# EAGLE board IO4-SignalDriver-Small_array (EAGLE 7.7.0)
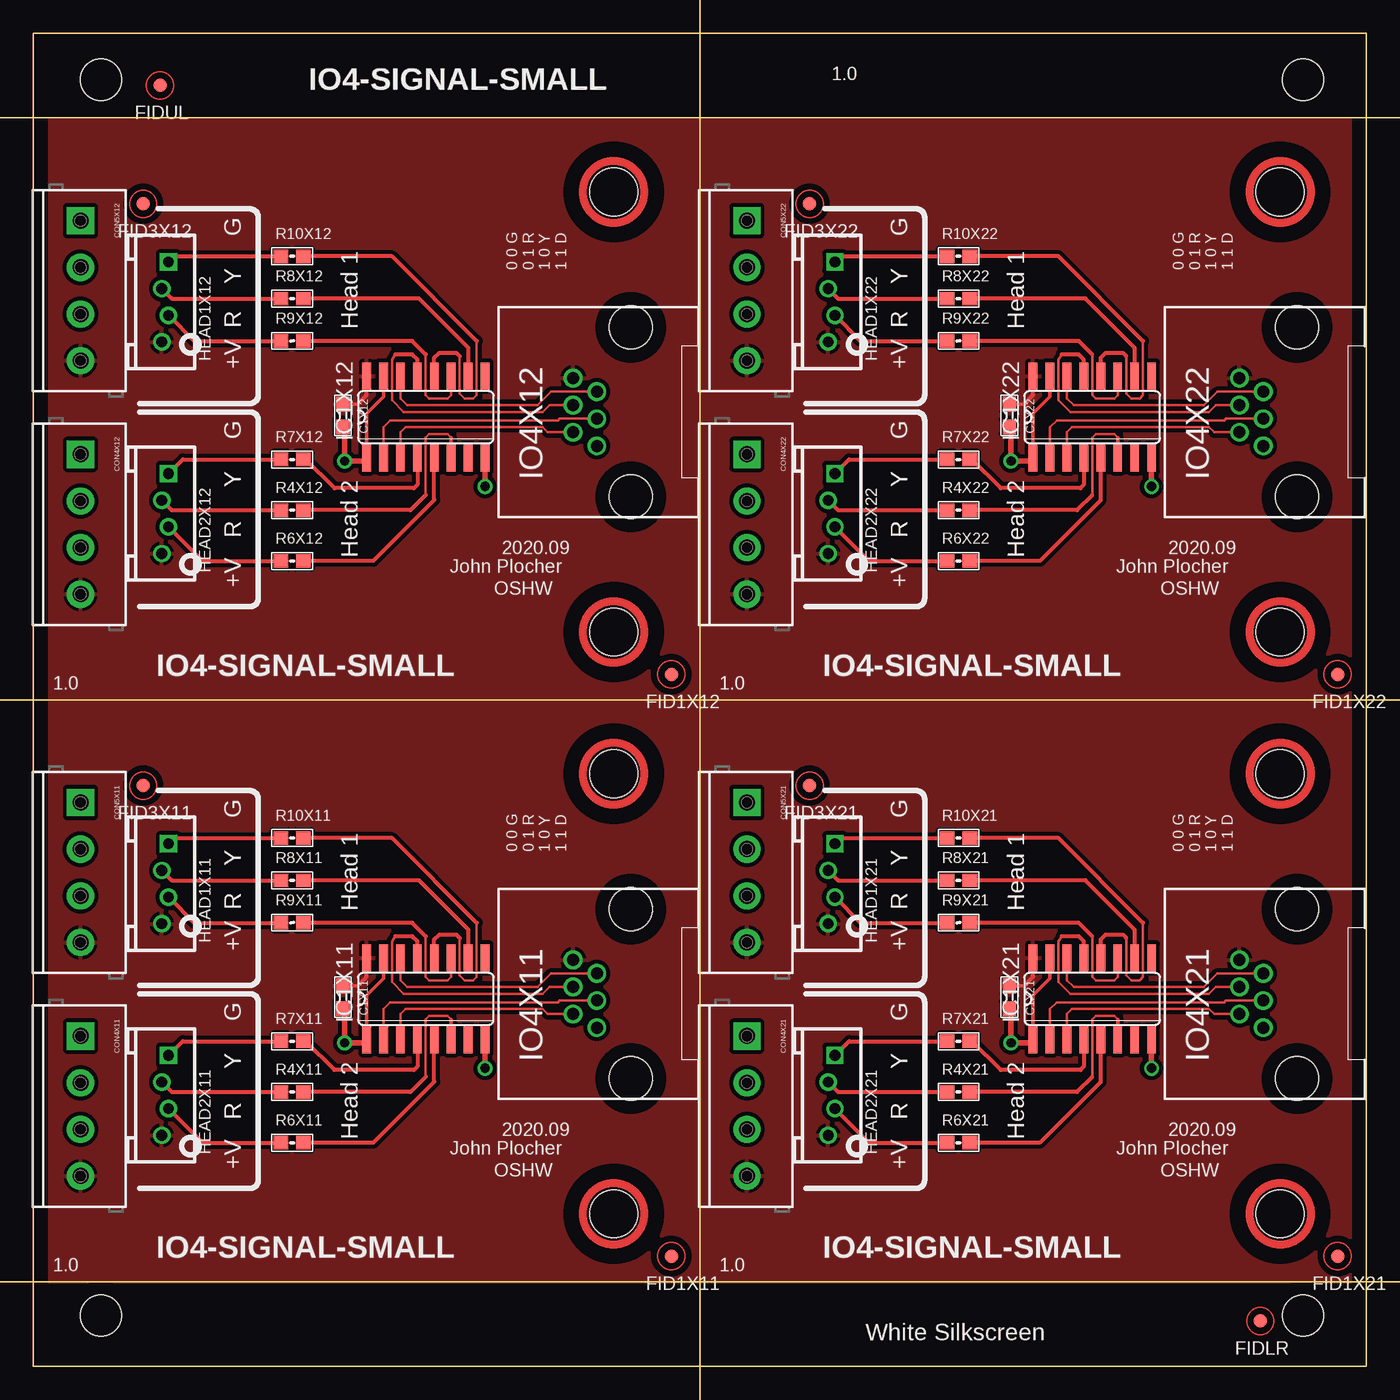
[diagram p0: board, top side]
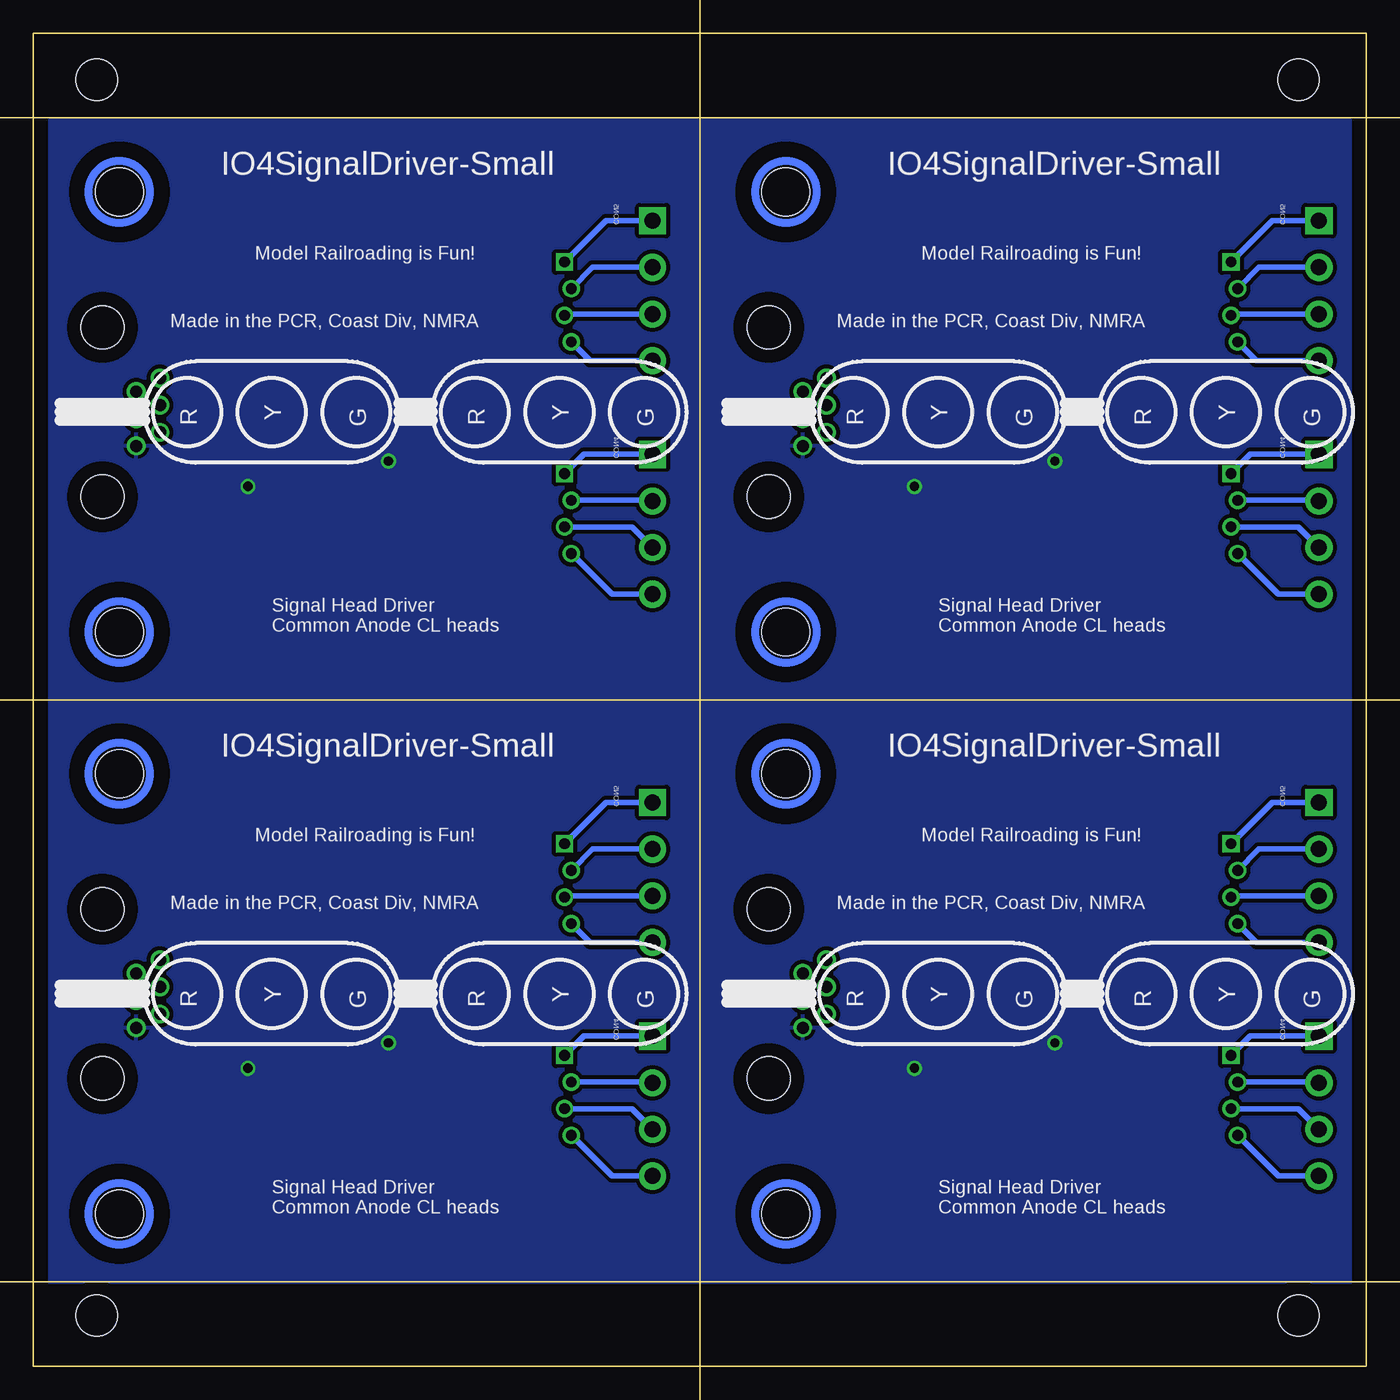
[diagram p1: board, bottom side, seen from below]

Size 100 x 100 mm. Coordinates in mm from the lower left corner, seen from the top.
Copper layers (1*16): Top 0.035mm / dielectric 1.5mm / Bottom 0.035mm
Design rules "default": minimum track width 10mil, minimum drill 0.6mm, track to track 8mil, track to pad 8mil, pad to pad 8mil, via to via 8mil, smd to smd 8mil, copper to edge 40mil, drill to drill 8mil, minimum pad ring 10mil, minimum via ring 8mil, stop-mask expansion 4mil, vias tented up to drill 0mil, thermal gap 10mil

## Footprints (pad centres in the part's own frame; a part is rotated, then mirrored left to right if it is on the bottom)
BOARD-10X10-2X2-PANEL = hole 3.1: 5.08,96.52; 95.25,96.52; 5.08,3.81; 95.25,3.81
0603-CAP = smd 1.1 x 1: 1 -0.85,0; 2 0.85,0
SCREWTERMINAL-3.5MM-4 = drill 1.2 pad 2.032 square: 1 0,0 | drill 1.2 pad 2.032: 2 3.5,0; 3 7,0; 4 10.5,0
FIDUCIAL_1MM = smd 1 x 1: 1 0,0
4P-2.0 = drill 0.8 pad 1.27 square: 1 -3,0.254 | drill 0.8 pad 1.27: 2 -1,-0.254; 3 1,0.254; 4 3,-0.254
SO16 = smd 0.66 x 2.032: 1 -4.445,-3.073; 2 -3.175,-3.073; 3 -1.905,-3.073; 4 -0.635,-3.073; 5 0.635,-3.073; 6 1.905,-3.073; 7 3.175,-3.073; 8 4.445,-3.073; 9 4.445,3.073; 10 3.175,3.073; 11 1.905,3.073; 12 0.635,3.073; 13 -0.635,3.073; 14 -1.905,3.073; 15 -3.175,3.073; 16 -4.445,3.073
RJ25-INVERTED = drill 0.9 pad 1.4: 1 2.54,4.318; 2 1.524,2.54; 3 0.508,4.318; 4 -0.508,2.54; 5 -1.524,4.318; 6 -2.54,2.54 | hole 3.251: -6.35,0; 6.35,0
0603-RES = smd 1.1 x 1: 1 -0.85,0; 2 0.85,0
MOUNTINGHOLE = hole 3.6: 0,0

## Placement (x,y rotation side)
BOARD  BOARD  [BOARD-10X10-2X2-PANEL]  0,0 0 top
C1X11  0.1UF  [0603-CAP]  23.23,27.69 270 top
C1X12  0.1UF  [0603-CAP]  23.23,71.34 270 top
C1X21  0.1UF  [0603-CAP]  73.22,27.69 270 top
C1X22  0.1UF  [0603-CAP]  73.22,71.34 270 top
CON4X11  3.5mm  [SCREWTERMINAL-3.5MM-4]  3.54,24.77 270 top
CON4X12  3.5mm  [SCREWTERMINAL-3.5MM-4]  3.54,68.42 270 top
CON4X21  3.5mm  [SCREWTERMINAL-3.5MM-4]  53.54,24.77 270 top
CON4X22  3.5mm  [SCREWTERMINAL-3.5MM-4]  53.54,68.42 270 top
CON5X11  3.5mm  [SCREWTERMINAL-3.5MM-4]  3.54,42.29 270 top
CON5X12  3.5mm  [SCREWTERMINAL-3.5MM-4]  3.54,85.94 270 top
CON5X21  3.5mm  [SCREWTERMINAL-3.5MM-4]  53.54,42.29 270 top
CON5X22  3.5mm  [SCREWTERMINAL-3.5MM-4]  53.54,85.94 270 top
FID1X11  FIDUCIAL  [FIDUCIAL_1MM]  47.86,8.26 0 top
FID1X12  FIDUCIAL  [FIDUCIAL_1MM]  47.86,51.91 0 top
FID1X21  FIDUCIAL  [FIDUCIAL_1MM]  97.86,8.26 0 top
FID1X22  FIDUCIAL  [FIDUCIAL_1MM]  97.86,51.91 0 top
FID3X11  FIDUCIAL  [FIDUCIAL_1MM]  8.24,43.56 0 top
FID3X12  FIDUCIAL  [FIDUCIAL_1MM]  8.24,87.21 0 top
FID3X21  FIDUCIAL  [FIDUCIAL_1MM]  58.24,43.56 0 top
FID3X22  FIDUCIAL  [FIDUCIAL_1MM]  58.24,87.21 0 top
FIDLR  FIDUCIAL  [FIDUCIAL_1MM]  92.06,3.39 0 top
FIDUL  FIDUCIAL  [FIDUCIAL_1MM]  9.51,96.1 0 top
HEAD1X11  2mm  [4P-2.0]  9.89,36.2 270 top
HEAD1X12  2mm  [4P-2.0]  9.89,79.84 270 top
HEAD1X21  2mm  [4P-2.0]  59.89,36.2 270 top
HEAD1X22  Head 1  [4P-2.0]  59.89,79.84 270 top
HEAD2X11  2mm  [4P-2.0]  9.89,20.32 270 top
HEAD2X12  Head 2  [4P-2.0]  9.89,63.97 270 top
HEAD2X21  2mm  [4P-2.0]  59.89,20.32 270 top
HEAD2X22  Head 2  [4P-2.0]  59.89,63.97 270 top
IC1X11  74HS139A  [SO16]  29.45,27.56 0 top
IC1X12  74HS139A  [SO16]  29.45,71.21 0 top
IC1X21  74HS139A  [SO16]  79.45,27.56 0 top
IC1X22  74HS139A  [SO16]  79.45,71.21 0 top
IO4X11  RJ12/6  [RJ25-INVERTED]  44.81,27.94 90 top
IO4X12  RJ12/6  [RJ25-INVERTED]  44.81,71.59 90 top
IO4X21  RJ12/6  [RJ25-INVERTED]  94.81,27.94 90 top
IO4X22  RJ12/6  [RJ25-INVERTED]  94.81,71.59 90 top
R4X11  1k0  [0603-RES]  19.41,20.57 0 top
R4X12  1k0  [0603-RES]  19.41,64.22 0 top
R4X21  1k0  [0603-RES]  69.42,20.57 0 top
R4X22  1k0  [0603-RES]  69.42,64.22 0 top
R6X11  2k2  [0603-RES]  19.41,16.76 0 top
R6X12  2k2  [0603-RES]  19.41,60.41 0 top
R6X21  2k2  [0603-RES]  69.42,16.76 0 top
R6X22  2k2  [0603-RES]  69.42,60.41 0 top
R7X11  2k2  [0603-RES]  19.41,24.38 0 top
R7X12  2k2  [0603-RES]  19.41,68.03 0 top
R7X21  2k2  [0603-RES]  69.42,24.38 0 top
R7X22  2k2  [0603-RES]  69.42,68.03 0 top
R8X11  1k0  [0603-RES]  19.41,36.45 0 top
R8X12  1k0  [0603-RES]  19.41,80.1 0 top
R8X21  1k0  [0603-RES]  69.42,36.45 0 top
R8X22  1k0  [0603-RES]  69.42,80.1 0 top
R9X11  2k2  [0603-RES]  19.41,33.27 0 top
R9X12  2k2  [0603-RES]  19.41,76.92 0 top
R9X21  2k2  [0603-RES]  69.42,33.27 0 top
R9X22  2k2  [0603-RES]  69.42,76.92 0 top
R10X11  2k2  [0603-RES]  19.41,39.62 0 top
R10X12  2k2  [0603-RES]  19.41,83.27 0 top
R10X21  2k2  [0603-RES]  69.42,39.62 0 top
R10X22  2k2  [0603-RES]  69.42,83.27 0 top
U$1X11  MOUNTINGHOLE  [MOUNTINGHOLE]  43.55,11.43 0 top
U$1X12  MOUNTINGHOLE  [MOUNTINGHOLE]  43.55,55.08 0 top
U$1X21  MOUNTINGHOLE  [MOUNTINGHOLE]  93.55,11.43 0 top
U$1X22  MOUNTINGHOLE  [MOUNTINGHOLE]  93.55,55.08 0 top
U$2X11  MOUNTINGHOLE  [MOUNTINGHOLE]  43.55,44.45 0 top
U$2X12  MOUNTINGHOLE  [MOUNTINGHOLE]  43.55,88.1 0 top
U$2X21  MOUNTINGHOLE  [MOUNTINGHOLE]  93.55,44.45 0 top
U$2X22  MOUNTINGHOLE  [MOUNTINGHOLE]  93.55,88.1 0 top

## Library data of the parts
BOARD C1X11 C1X12 C1X21 C1X22 CON4X11 CON4X12 CON4X21 CON4X22 CON5X11 CON5X12 CON5X21 CON5X22 FID1X11 FID1X12 FID1X21 FID1X22 FID3X11 FID3X12 FID3X21 FID3X22 FIDLR FIDUL HEAD1X11 HEAD1X12 HEAD1X21 HEAD1X22 HEAD2X11 HEAD2X12 HEAD2X21 HEAD2X22 IC1X11 IC1X12 IC1X21 IC1X22 IO4X11 IO4X12 IO4X21 IO4X22 R4X11 R4X12 R4X21 R4X22 R6X11 R6X12 R6X21 R6X22 R7X11 R7X12 R7X21 R7X22 R8X11 R8X12 R8X21 R8X22 R9X11 R9X12 R9X21 R9X22 R10X11 R10X12 R10X21 R10X22 U$1X11 U$1X12 U$1X21 U$1X22 U$2X11 U$2X12 U$2X21 U$2X22 = SPCoast

## Nets
G1-LEDX11: CON5X11.1 HEAD1X11.1 R10X11.1
G1-LEDX12: CON5X12.1 HEAD1X12.1 R10X12.1
G1-LEDX21: CON5X21.1 HEAD1X21.1 R10X21.1
G1-LEDX22: CON5X22.1 HEAD1X22.1 R10X22.1
G1X11: IC1X11.12 R10X11.2
G1X12: IC1X12.12 R10X12.2
G1X21: IC1X21.12 R10X21.2
G1X22: IC1X22.12 R10X22.2
G2-LEDX11: CON4X11.1 HEAD2X11.1 R7X11.1
G2-LEDX12: CON4X12.1 HEAD2X12.1 R7X12.1
G2-LEDX21: CON4X21.1 HEAD2X21.1 R7X21.1
G2-LEDX22: CON4X22.1 HEAD2X22.1 R7X22.1
G2X11: IC1X11.4 R7X11.2
G2X12: IC1X12.4 R7X12.2
G2X21: IC1X21.4 R7X21.2
G2X22: IC1X22.4 R7X22.2
GNDX11: C1X11.2 IC1X11.1 IC1X11.8 IC1X11.15 IO4X11.6
GNDX12: C1X12.2 IC1X12.1 IC1X12.8 IC1X12.15 IO4X12.6
GNDX21: C1X21.2 IC1X21.1 IC1X21.8 IC1X21.15 IO4X21.6
GNDX22: C1X22.2 IC1X22.1 IC1X22.8 IC1X22.15 IO4X22.6
P1X11: IC1X11.14 IO4X11.2
P1X12: IC1X12.14 IO4X12.2
P1X21: IC1X21.14 IO4X21.2
P1X22: IC1X22.14 IO4X22.2
P2X11: IC1X11.13 IO4X11.3
P2X12: IC1X12.13 IO4X12.3
P2X21: IC1X21.13 IO4X21.3
P2X22: IC1X22.13 IO4X22.3
P3X11: IC1X11.2 IO4X11.4
P3X12: IC1X12.2 IO4X12.4
P3X21: IC1X21.2 IO4X21.4
P3X22: IC1X22.2 IO4X22.4
P4X11: IC1X11.3 IO4X11.5
P4X12: IC1X12.3 IO4X12.5
P4X21: IC1X21.3 IO4X21.5
P4X22: IC1X22.3 IO4X22.5
R1-LEDX11: CON5X11.3 HEAD1X11.3 R9X11.1
R1-LEDX12: CON5X12.3 HEAD1X12.3 R9X12.1
R1-LEDX21: CON5X21.3 HEAD1X21.3 R9X21.1
R1-LEDX22: CON5X22.3 HEAD1X22.3 R9X22.1
R1X11: IC1X11.11 R9X11.2
R1X12: IC1X12.11 R9X12.2
R1X21: IC1X21.11 R9X21.2
R1X22: IC1X22.11 R9X22.2
R2-LEDX11: CON4X11.3 HEAD2X11.3 R6X11.1
R2-LEDX12: CON4X12.3 HEAD2X12.3 R6X12.1
R2-LEDX21: CON4X21.3 HEAD2X21.3 R6X21.1
R2-LEDX22: CON4X22.3 HEAD2X22.3 R6X22.1
R2X11: IC1X11.5 R6X11.2
R2X12: IC1X12.5 R6X12.2
R2X21: IC1X21.5 R6X21.2
R2X22: IC1X22.5 R6X22.2
VCCX11: C1X11.1 CON4X11.4 CON5X11.4 HEAD1X11.4 HEAD2X11.4 IC1X11.16 IO4X11.1
VCCX12: C1X12.1 CON4X12.4 CON5X12.4 HEAD1X12.4 HEAD2X12.4 IC1X12.16 IO4X12.1
VCCX21: C1X21.1 CON4X21.4 CON5X21.4 HEAD1X21.4 HEAD2X21.4 IC1X21.16 IO4X21.1
VCCX22: C1X22.1 CON4X22.4 CON5X22.4 HEAD1X22.4 HEAD2X22.4 IC1X22.16 IO4X22.1
Y1-LEDX11: CON5X11.2 HEAD1X11.2 R8X11.1
Y1-LEDX12: CON5X12.2 HEAD1X12.2 R8X12.1
Y1-LEDX21: CON5X21.2 HEAD1X21.2 R8X21.1
Y1-LEDX22: CON5X22.2 HEAD1X22.2 R8X22.1
Y1X11: IC1X11.10 R8X11.2
Y1X12: IC1X12.10 R8X12.2
Y1X21: IC1X21.10 R8X21.2
Y1X22: IC1X22.10 R8X22.2
Y2-LEDX11: CON4X11.2 HEAD2X11.2 R4X11.1
Y2-LEDX12: CON4X12.2 HEAD2X12.2 R4X12.1
Y2-LEDX21: CON4X21.2 HEAD2X21.2 R4X21.1
Y2-LEDX22: CON4X22.2 HEAD2X22.2 R4X22.1
Y2X11: IC1X11.6 R4X11.2
Y2X12: IC1X12.6 R4X12.2
Y2X21: IC1X21.6 R4X21.2
Y2X22: IC1X22.6 R4X22.2

## Tracks (layer width: path | path; a pad name or v marks a point on that pad's centre or on a via)
G1-LEDX11
  Top 0.305: HEAD1X11.1 10.57,39.62 R10X11.1
  Bottom 0.406: CON5X11.1 7.05,42.29 HEAD1X11.1
G1-LEDX12
  Top 0.305: HEAD1X12.1 10.57,83.27 R10X12.1
  Bottom 0.406: CON5X12.1 7.05,85.94 HEAD1X12.1
G1-LEDX21
  Top 0.305: HEAD1X21.1 60.57,39.62 R10X21.1
  Bottom 0.406: CON5X21.1 57.05,42.29 HEAD1X21.1
G1-LEDX22
  Top 0.305: HEAD1X22.1 60.57,83.27 R10X22.1
  Bottom 0.406: CON5X22.1 57.05,85.94 HEAD1X22.1
G1X11
  Top 0.203: 31.99,32.13 31.99,29.34 32.37,28.96 33,28.96 33.26,29.21 33.26,33.27
  Top 0.305: IC1X11.12 30.08,32 30.46,32.38 31.73,32.38 31.99,32.13 | 33.26,33.27 26.91,39.62 R10X11.2
G1X12
  Top 0.203: 31.99,75.78 31.99,72.99 32.37,72.61 33,72.61 33.26,72.86 33.26,76.92
  Top 0.305: IC1X12.12 30.08,75.65 30.46,76.03 31.73,76.03 31.99,75.78 | 33.26,76.92 26.91,83.27 R10X12.2
G1X21
  Top 0.203: 81.99,32.13 81.99,29.34 82.37,28.96 83,28.96 83.26,29.21 83.26,33.27
  Top 0.305: IC1X21.12 80.08,32 80.46,32.38 81.73,32.38 81.99,32.13 | 83.26,33.27 76.91,39.62 R10X21.2
G1X22
  Top 0.203: 81.99,75.78 81.99,72.99 82.37,72.61 83,72.61 83.26,72.86 83.26,76.92
  Top 0.305: IC1X22.12 80.08,75.65 80.46,76.03 81.73,76.03 81.99,75.78 | 83.26,76.92 76.91,83.27 R10X22.2
G2-LEDX11
  Top 0.305: HEAD2X11.1 11.21,24.38 R7X11.1
  Bottom 0.406: CON4X11.1 8.7,24.77 HEAD2X11.1
G2-LEDX12
  Top 0.305: HEAD2X12.1 11.21,68.03 R7X12.1
  Bottom 0.406: CON4X12.1 8.7,68.42 HEAD2X12.1
G2-LEDX21
  Top 0.305: HEAD2X21.1 61.21,24.38 R7X21.1
  Bottom 0.406: CON4X21.1 58.7,24.77 HEAD2X21.1
G2-LEDX22
  Top 0.305: HEAD2X22.1 61.21,68.03 R7X22.1
  Bottom 0.406: CON4X22.1 58.7,68.42 HEAD2X22.1
G2X11
  Top 0.305: IC1X11.4 28.81,22.48 28.56,22.23 22.59,22.23 20.43,24.38 R7X11.2
G2X12
  Top 0.305: IC1X12.4 28.81,66.13 28.56,65.88 22.59,65.88 20.43,68.03 R7X12.2
G2X21
  Top 0.305: IC1X21.4 78.81,22.48 78.56,22.23 72.59,22.23 70.43,24.38 R7X21.2
G2X22
  Top 0.305: IC1X22.4 78.81,66.13 78.56,65.88 72.59,65.88 70.43,68.03 R7X22.2
GNDX11  (via drill 0.7 pad 1.11)
  Top 0.254: IC1X11.15 26.27,29.08 25,27.81 IC1X11.1 | C1X11.2 23.24,26.8
  Top 0.406: 23.24,26.8 23.35,26.68 v23.35,24.26 24.77,24.26 IC1X11.1 | IC1X11.8 v33.89,22.35
  pour Bottom (isolate 0.305): 0,6.35 0,49.91 49.9,49.91 49.9,6.35
GNDX12  (via drill 0.7 pad 1.11)
  Top 0.254: IC1X12.15 26.27,72.73 25,71.46 IC1X12.1 | C1X12.2 23.24,70.45
  Top 0.406: 23.24,70.45 23.35,70.33 v23.35,67.91 24.77,67.91 IC1X12.1 | IC1X12.8 v33.89,66
  pour Bottom (isolate 0.305): 0,50 0,93.56 49.9,93.56 49.9,50
GNDX21  (via drill 0.7 pad 1.11)
  Top 0.254: IC1X21.15 76.27,29.08 75,27.81 IC1X21.1 | C1X21.2 73.24,26.8
  Top 0.406: 73.24,26.8 73.35,26.68 v73.35,24.26 74.77,24.26 IC1X21.1 | IC1X21.8 v83.89,22.35
  pour Bottom (isolate 0.305): 50,6.35 50,49.91 99.89,49.91 99.89,6.35
GNDX22  (via drill 0.7 pad 1.11)
  Top 0.254: IC1X22.15 76.27,72.73 75,71.46 IC1X22.1 | C1X22.2 73.24,70.45
  Top 0.406: 73.24,70.45 73.35,70.33 v73.35,67.91 74.77,67.91 IC1X22.1 | IC1X22.8 v83.89,66
  pour Bottom (isolate 0.305): 50,50 50,93.56 99.89,93.56 99.89,50
P1X11
  Top 0.203: IC1X11.14 27.54,28.96 28.05,28.45 37.83,28.45 38.85,29.46 IO4X11.2
P1X12
  Top 0.203: IC1X12.14 27.54,72.61 28.05,72.1 37.83,72.1 38.85,73.11 IO4X12.2
P1X21
  Top 0.203: IC1X21.14 77.54,28.96 78.05,28.45 87.83,28.45 88.85,29.46 IO4X21.2
P1X22
  Top 0.203: IC1X22.14 77.54,72.61 78.05,72.1 87.83,72.1 88.85,73.11 IO4X22.2
P2X11
  Top 0.203: 27.16,32.26 26.91,31.88 26.91,28.83 27.8,27.94 38.21,27.94 38.72,28.45 IO4X11.3
  Top 0.305: IC1X11.13 28.81,31.88 28.43,32.26 27.16,32.26
P2X12
  Top 0.203: 27.16,75.91 26.91,75.53 26.91,72.48 27.8,71.59 38.21,71.59 38.72,72.1 IO4X12.3
  Top 0.305: IC1X12.13 28.81,75.53 28.43,75.91 27.16,75.91
P2X21
  Top 0.203: 77.16,32.26 76.91,31.88 76.91,28.83 77.8,27.94 88.21,27.94 88.72,28.45 IO4X21.3
  Top 0.305: IC1X21.13 78.81,31.88 78.43,32.26 77.16,32.26
P2X22
  Top 0.203: 77.16,75.91 76.91,75.53 76.91,72.48 77.8,71.59 88.21,71.59 88.72,72.1 IO4X22.3
  Top 0.305: IC1X22.13 78.81,75.53 78.43,75.91 77.16,75.91
P3X11
  Top 0.203: IC1X11.2 26.27,26.8 26.78,27.3 39.35,27.3 39.48,27.43 IO4X11.4
P3X12
  Top 0.203: IC1X12.2 26.27,70.45 26.78,70.95 39.35,70.95 39.48,71.08 IO4X12.4
P3X21
  Top 0.203: IC1X21.2 76.27,26.8 76.78,27.3 89.35,27.3 89.48,27.43 IO4X21.4
P3X22
  Top 0.203: IC1X22.2 76.27,70.45 76.78,70.95 89.35,70.95 89.48,71.08 IO4X22.4
P4X11
  Top 0.203: IC1X11.3 27.54,26.42 27.92,26.8 38.21,26.8 38.59,26.42 IO4X11.5
P4X12
  Top 0.203: IC1X12.3 27.54,70.07 27.92,70.45 38.21,70.45 38.59,70.07 IO4X12.5
P4X21
  Top 0.203: IC1X21.3 77.54,26.42 77.92,26.8 88.21,26.8 88.59,26.42 IO4X21.5
P4X22
  Top 0.203: IC1X22.3 77.54,70.07 77.92,70.45 88.21,70.45 88.59,70.07 IO4X22.5
R1-LEDX11
  Top 0.305: HEAD1X11.3 12.06,33.27 R9X11.1
  Bottom 0.406: CON5X11.3 10.05,35.29 HEAD1X11.3
R1-LEDX12
  Top 0.305: HEAD1X12.3 12.06,76.92 R9X12.1
  Bottom 0.406: CON5X12.3 10.05,78.94 HEAD1X12.3
R1-LEDX21
  Top 0.305: HEAD1X21.3 62.06,33.27 R9X21.1
  Bottom 0.406: CON5X21.3 60.05,35.29 HEAD1X21.3
R1-LEDX22
  Top 0.305: HEAD1X22.3 62.06,76.92 R9X22.1
  Bottom 0.406: CON5X22.3 60.05,78.94 HEAD1X22.3
R1X11
  Top 0.203: IC1X11.11 31.35,29.21 31.1,28.96 29.7,28.96 29.45,29.21 29.45,32.26
  Top 0.305: 29.45,32.26 28.43,33.27 R9X11.2
R1X12
  Top 0.203: IC1X12.11 31.35,72.86 31.1,72.61 29.7,72.61 29.45,72.86 29.45,75.91
  Top 0.305: 29.45,75.91 28.43,76.92 R9X12.2
R1X21
  Top 0.203: IC1X21.11 81.35,29.21 81.1,28.96 79.7,28.96 79.45,29.21 79.45,32.26
  Top 0.305: 79.45,32.26 78.43,33.27 R9X21.2
R1X22
  Top 0.203: IC1X22.11 81.35,72.86 81.1,72.61 79.7,72.61 79.45,72.86 79.45,75.91
  Top 0.305: 79.45,75.91 78.43,76.92 R9X22.2
R2-LEDX11
  Top 0.305: HEAD2X11.3 12.7,16.76 R6X11.1
  Bottom 0.406: HEAD2X11.3 5.09,19.32 CON4X11.3
R2-LEDX12
  Top 0.305: HEAD2X12.3 12.7,60.41 R6X12.1
  Bottom 0.406: HEAD2X12.3 5.09,62.97 CON4X12.3
R2-LEDX21
  Top 0.305: HEAD2X21.3 62.7,16.76 R6X21.1
  Bottom 0.406: HEAD2X21.3 55.09,19.32 CON4X21.3
R2-LEDX22
  Top 0.305: HEAD2X22.3 62.7,60.41 R6X22.1
  Bottom 0.406: HEAD2X22.3 55.09,62.97 CON4X22.3
R2X11
  Top 0.305: IC1X11.5 30.08,21.34 25.51,16.76 R6X11.2
R2X12
  Top 0.305: IC1X12.5 30.08,64.99 25.51,60.41 R6X12.2
R2X21
  Top 0.305: IC1X21.5 80.08,21.34 75.51,16.76 R6X21.2
R2X22
  Top 0.305: IC1X22.5 80.08,64.99 75.51,60.41 R6X22.2
VCCX11
  Top 0.305: IC1X11.16 25,29.21 24.38,28.59 C1X11.1 23.21,28.57
  Bottom 0.406: CON5X11.4 8.23,31.79 HEAD1X11.4 | CON4X11.4 6.58,14.27 HEAD2X11.4
  pour Top (isolate 0.305): 0,6.35 0,49.91 49.9,49.91 49.9,6.35
VCCX12
  Top 0.305: IC1X12.16 25,72.86 24.38,72.24 C1X12.1 23.21,72.22
  Bottom 0.406: CON5X12.4 8.23,75.44 HEAD1X12.4 | CON4X12.4 6.58,57.91 HEAD2X12.4
  pour Top (isolate 0.305): 0,50 0,93.56 49.9,93.56 49.9,50
VCCX21
  Top 0.305: IC1X21.16 75,29.21 74.38,28.59 C1X21.1 73.21,28.57
  Bottom 0.406: CON5X21.4 58.23,31.79 HEAD1X21.4 | CON4X21.4 56.58,14.27 HEAD2X21.4
  pour Top (isolate 0.305): 50,6.35 50,49.91 99.89,49.91 99.89,6.35
VCCX22
  Top 0.305: IC1X22.16 75,72.86 74.38,72.24 C1X22.1 73.21,72.22
  Bottom 0.406: CON5X22.4 58.23,75.44 HEAD1X22.4 | CON4X22.4 56.58,57.91 HEAD2X22.4
  pour Top (isolate 0.305): 50,50 50,93.56 99.89,93.56 99.89,50
Y1-LEDX11
  Top 0.305: HEAD1X11.2 10.38,36.45 R8X11.1
  Bottom 0.406: CON5X11.2 8.04,38.79 HEAD1X11.2
Y1-LEDX12
  Top 0.305: HEAD1X12.2 10.38,80.1 R8X12.1
  Bottom 0.406: CON5X12.2 8.04,82.44 HEAD1X12.2
Y1-LEDX21
  Top 0.305: HEAD1X21.2 60.38,36.45 R8X21.1
  Bottom 0.406: CON5X21.2 58.04,38.79 HEAD1X21.2
Y1-LEDX22
  Top 0.305: HEAD1X22.2 60.38,80.1 R8X22.1
  Bottom 0.406: CON5X22.2 58.04,82.44 HEAD1X22.2
Y1X11
  Top 0.305: IC1X11.10 32.62,32.77 28.94,36.45 R8X11.2
Y1X12
  Top 0.305: IC1X12.10 32.62,76.42 28.94,80.1 R8X12.2
Y1X21
  Top 0.305: IC1X21.10 82.62,32.77 78.94,36.45 R8X21.2
Y1X22
  Top 0.305: IC1X22.10 82.62,76.42 78.94,80.1 R8X22.2
Y2-LEDX11
  Top 0.305: HEAD2X11.2 10.38,20.57 R4X11.1
  Bottom 0.406: HEAD2X11.2 3.6,21.32 CON4X11.2
Y2-LEDX12
  Top 0.305: HEAD2X12.2 10.38,64.22 R4X12.1
  Bottom 0.406: HEAD2X12.2 3.6,64.97 CON4X12.2
Y2-LEDX21
  Top 0.305: HEAD2X21.2 60.38,20.57 R4X21.1
  Bottom 0.406: HEAD2X21.2 53.59,21.32 CON4X21.2
Y2-LEDX22
  Top 0.305: HEAD2X22.2 60.38,64.22 R4X22.1
  Bottom 0.406: HEAD2X22.2 53.59,64.97 CON4X22.2
Y2X11
  Top 0.203: 31.35,26.04 31.1,26.29 29.7,26.29 29.45,26.04 29.45,21.72
  Top 0.254: IC1X11.6 31.35,26.04
  Top 0.305: 29.45,21.72 28.3,20.57 R4X11.2
Y2X12
  Top 0.203: 31.35,69.69 31.1,69.94 29.7,69.94 29.45,69.69 29.45,65.37
  Top 0.254: IC1X12.6 31.35,69.69
  Top 0.305: 29.45,65.37 28.3,64.22 R4X12.2
Y2X21
  Top 0.203: 81.35,26.04 81.1,26.29 79.7,26.29 79.45,26.04 79.45,21.72
  Top 0.254: IC1X21.6 81.35,26.04
  Top 0.305: 79.45,21.72 78.31,20.57 R4X21.2
Y2X22
  Top 0.203: 81.35,69.69 81.1,69.94 79.7,69.94 79.45,69.69 79.45,65.37
  Top 0.254: IC1X22.6 81.35,69.69
  Top 0.305: 79.45,65.37 78.31,64.22 R4X22.2

## Text on the board
tPlace: IO4-SIGNAL-SMALL | 1.0 | G | G | Head 1 | Head 1 | Y | 0 0 G / 0 1 R / 1 0 Y / 1 1 D | Y | 0 0 G / 0 1 R / 1 0 Y / 1 1 D | R | R | +V | +V | G | G | Y | Head 2 | Y | Head 2 | R | R | 2020.09 | 2020.09 | +V | +V | John Plocher | John Plocher | OSHW | OSHW | IO4-SIGNAL-SMALL | IO4-SIGNAL-SMALL | 1.0 | 1.0 | G | G | Head 1 | Head 1 | Y | 0 0 G / 0 1 R / 1 0 Y / 1 1 D | Y | 0 0 G / 0 1 R / 1 0 Y / 1 1 D | R | R | +V | +V | G | G | Y | Head 2 | Y | Head 2 | R | R | 2020.09 | 2020.09 | +V | +V | John Plocher | John Plocher | OSHW | OSHW | IO4-SIGNAL-SMALL | IO4-SIGNAL-SMALL | 1.0 | 1.0 | White Silkscreen
bPlace: IO4SignalDriver-Small | IO4SignalDriver-Small | CON5 | CON5 | Model Railroading is Fun! | Model Railroading is Fun! | Made in the PCR, Coast Div, NMRA | Made in the PCR, Coast Div, NMRA | G | Y | R | G | Y | R | G | Y | R | G | Y | R | CON4 | CON4 | Signal Head Driver / Common Anode CL heads | Signal Head Driver / Common Anode CL heads | IO4SignalDriver-Small | IO4SignalDriver-Small | CON5 | CON5 | Model Railroading is Fun! | Model Railroading is Fun! | Made in the PCR, Coast Div, NMRA | Made in the PCR, Coast Div, NMRA | Y | Y | Y | Y | G | R | G | R | G | R | G | R | CON4 | CON4 | Signal Head Driver / Common Anode CL heads | Signal Head Driver / Common Anode CL heads
_tNames: CON5 | CON5 | R10 | R10 | R8 | R8 | R9 | R9 | HEAD1 | C1 | HEAD1 | C1 | CON4 | CON4 | R7 | IO4 | R7 | IO4 | R4 | R4 | IC1 | IC1 | R6 | R6 | HEAD2 | HEAD2 | CON5 | CON5 | R10 | R10 | R8 | R8 | R9 | R9 | HEAD1 | C1 | HEAD1 | C1 | CON4 | CON4 | R7 | IO4 | R7 | IO4 | R4 | R4 | IC1 | IC1 | R6 | R6 | HEAD2 | HEAD2